# EAGLE board pinball-shield-2016-v1 (EAGLE 7.5.0)
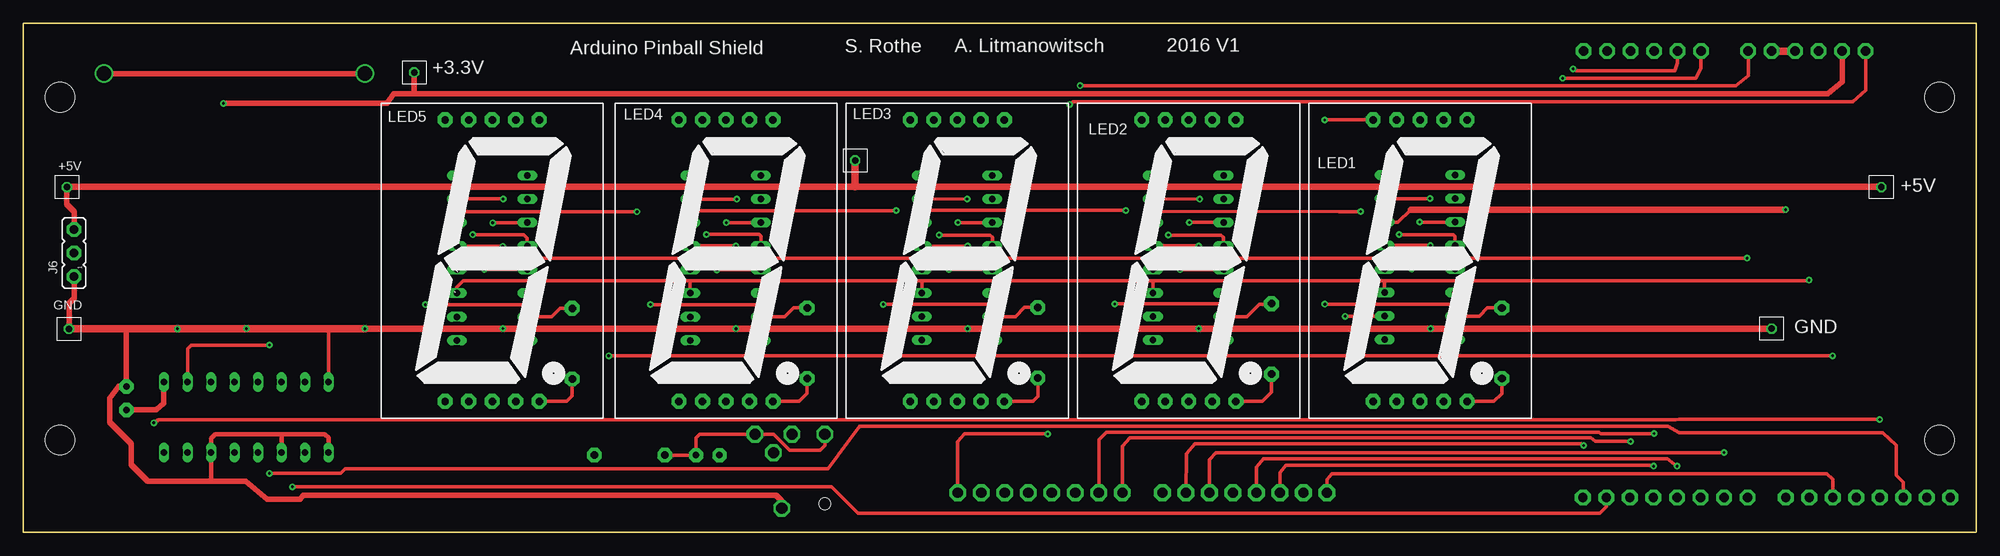
[diagram p0: board, top side]
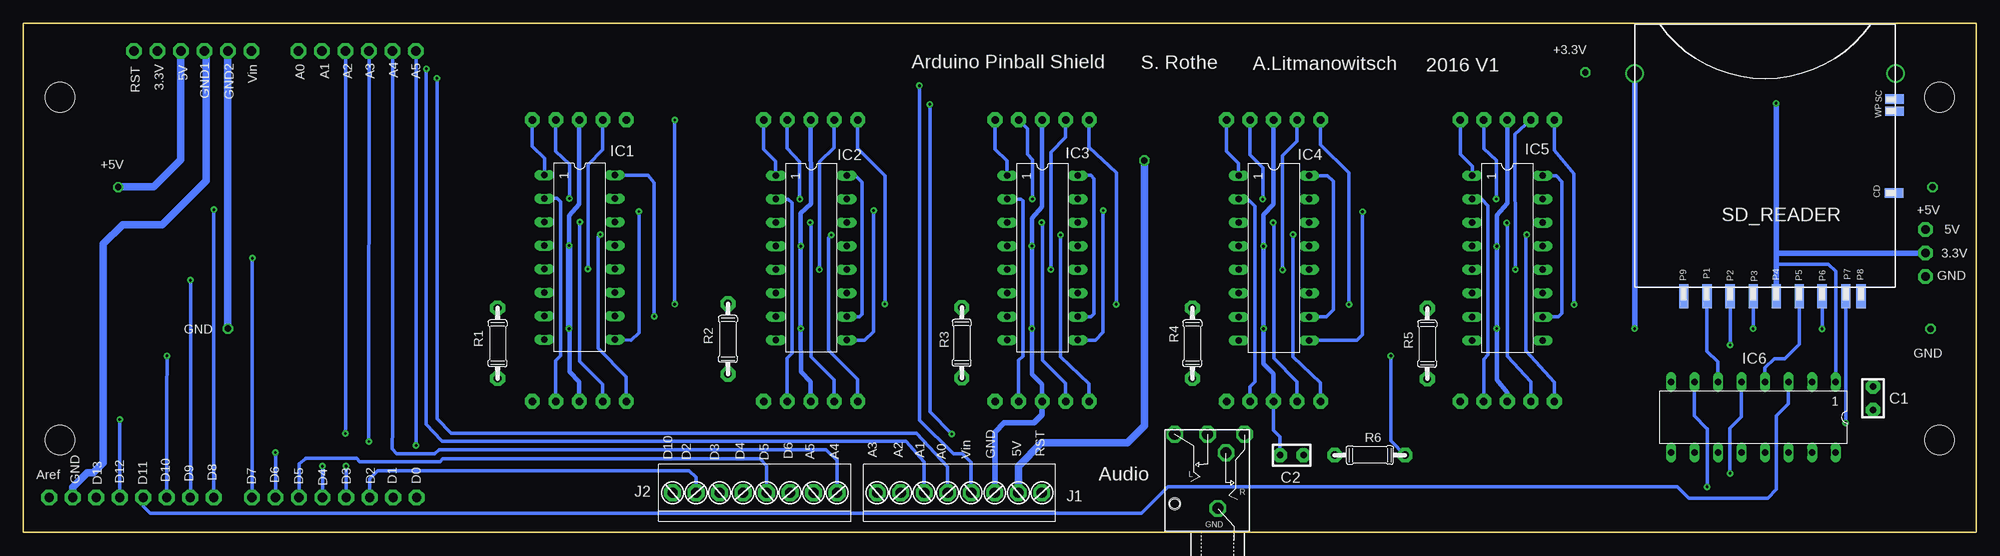
[diagram p1: board, bottom side, seen from below]

Size 211 x 55 mm. Coordinates in mm from the lower left corner, seen from the top.
Outline: 0,0 211,0 211,55 0,55 0,0
Copper layers (1*16): Top 0.035mm / dielectric 1.5mm / Bottom 0.035mm
Design rules "Alit 2 Layer 0_0-16": minimum track width 0.15mm, minimum drill 0.25mm, track to track 0.17mm, track to pad 0.17mm, pad to pad 0.17mm, via to via 0.17mm, smd to smd 0mil, copper to edge 0.5mm, drill to drill 0.6mm, minimum pad ring 0.2mm, minimum via ring 0.2mm, stop-mask expansion 0.16mm, vias tented up to drill 0mil, thermal gap 10mil
Net classes: 0 default: width 0.152 mm, drill 0.305 mm, clearance 0.152 mm; 1 power: width 0.61 mm, drill 0.61 mm, clearance 0.254 mm; 2 gnd: width 0.305 mm, drill 0.559 mm, clearance 0.254 mm; 3 usbvcc: width 0.508 mm, drill 0.61 mm, clearance 0.254 mm; 4 aref: width 0.406 mm, drill 0.61 mm, clearance 0.254 mm
Holes 3.2 mm at 4,10 207,10 207,47 4,47

## Footprints (pad centres in the part's own frame; a part is rotated, then mirrored left to right if it is on the bottom)
02P101QK = drill 0.711 pad 1.524 octagon: 1 0,0; 2 2.54,0
JACK_CONRAD_730294 = drill 1.2 pad 1.8 octagon: 1 0,2.5; 2 2.9,10.5; 3 0.9,8.5; 4 -1.1,10.5; 5 -4.65,10.5 | hole 1.3: -4.65,3
DRILL040 = drill 1 pad 1.7 octagon: P$1 0,0
CON01_FOR_AT2560_ALIT = drill 0.7 pad 1.1 octagon: 1 0,0
DIL16 = drill 0.7 pad 1.1 long: 1 -8.89,-3.81; 2 -6.35,-3.81; 3 -3.81,-3.81; 4 -1.27,-3.81; 5 1.27,-3.81; 6 3.81,-3.81; 7 6.35,-3.81; 8 8.89,-3.81; 9 8.89,3.81; 10 6.35,3.81; 11 3.81,3.81; 12 1.27,3.81; 13 -1.27,3.81; 14 -3.81,3.81; 15 -6.35,3.81; 16 -8.89,3.81
PH2_54X8 = drill 1.1 pad 1.8 octagon: 1 0,0; 2 2.54,0; 3 5.08,0; 4 7.62,0; 5 10.16,0; 6 12.7,0; 7 15.24,0; 8 17.78,0
JP2 = drill 0.9 pad 1.6 octagon: 1 -2.54,0; 2 0,0; 3 2.54,0
7SEG-2.54 = drill 0.8 pad 1.6 octagon: 1 5.92,0.8; 2 8.46,0.8; 3 11,0.8; 4 13.54,0.8; 5 16.08,0.8; 6 16.08,31.21; 7 13.54,31.21; 8 11,31.21; 9 8.46,31.21; 10 5.92,31.21
0204/7 = drill 0.813 pad 1.6 octagon: 1 -3.81,0; 2 3.81,0
104H-TDA0-R = smd 1 x 2: CD 10.165,-13.365; SC 20.3,-13.385; WP 18.99,-13.385 | drill 1.6: GND0 23.055,-13.525; GND1 23.06,14.67 | smd 2.6 x 1: P1 -0.98,6.85; P2 -0.98,4.35; P3 -0.98,1.85; P4 -0.98,-0.63; P5 -0.98,-3.12; P6 -0.98,-5.59; P7 -0.98,-8.15; P8 -0.98,-9.8; P9 -0.98,9.36

## Placement (x,y rotation side)
C1  0.1uF  [02P101QK]  11.16,15.76 270 bottom
C2  1nF  [02P101QK]  72.68,8.35 180 bottom
E$1  [JACK_CONRAD_730294]  81.95,0.1 0 bottom
E$2  [DRILL040]  208.18,3.78 180 top
E$3  [DRILL040]  205.64,3.78 180 top
E$4  [DRILL040]  203.1,3.78 180 top
E$5  [DRILL040]  200.56,3.78 180 top
E$6  [CON01_FOR_AT2560_ALIT]  188.88,22.01 0 top
E$7  [CON01_FOR_AT2560_ALIT]  200.73,37.29 0 top
E$8  [DRILL040]  198.02,3.78 180 top
E$9  [DRILL040]  195.48,3.78 180 top
E$10  [DRILL040]  192.94,3.78 180 top
E$11  [CON01_FOR_AT2560_ALIT]  4.73,37.29 0 top
E$12  [DRILL040]  190.4,3.78 180 top
E$13  [DRILL040]  199.04,51.99 180 top
E$14  [DRILL040]  196.5,51.99 180 top
E$15  [DRILL040]  193.96,51.99 180 top
E$16  [DRILL040]  191.42,51.99 180 top
E$17  [DRILL040]  188.88,51.99 180 top
E$18  [DRILL040]  186.34,51.99 180 top
E$19  [DRILL040]  181.26,51.99 180 top
E$20  [DRILL040]  178.72,51.99 180 top
E$21  [DRILL040]  176.18,51.99 180 top
E$22  [DRILL040]  173.64,51.99 180 top
E$23  [DRILL040]  171.1,51.99 180 top
E$24  [DRILL040]  168.56,51.99 180 top
E$25  [DRILL040]  186.28,3.78 180 top
E$26  [DRILL040]  183.74,3.78 180 top
E$27  [DRILL040]  181.2,3.78 180 top
E$28  [DRILL040]  178.66,3.78 180 top
E$29  [DRILL040]  176.12,3.78 180 top
E$30  [DRILL040]  173.58,3.78 180 top
E$31  [DRILL040]  171.04,3.78 180 top
E$32  [DRILL040]  168.5,3.78 180 top
E$33  [CON01_FOR_AT2560_ALIT]  4.96,21.99 0 top
E$34  [CON01_FOR_AT2560_ALIT]  89.87,40.17 0 top
E$35  [CON01_FOR_AT2560_ALIT]  42.24,49.68 0 top
IC1  SN74LV595  [DIL16]  150.88,29.7 270 bottom
IC2  SN74LV595  [DIL16]  125.86,29.66 270 bottom
IC3  SN74LV595  [DIL16]  100.89,29.66 270 bottom
IC4  SN74LV595  [DIL16]  75.88,29.64 270 bottom
IC5  SN74LV595  [DIL16]  50.66,29.64 270 bottom
IC6  74LS4050  [DIL16]  24.1,12.45 180 bottom
J1  [PH2_54X8]  118.74,4.28 0 bottom
J2  [PH2_54X8]  140.85,4.28 0 bottom
J6  [JP2]  5.5,30.17 90 top
LED1  SC10-21  [7SEG-2.54]  139.92,13.35 0 top
LED2  SC10-21  [7SEG-2.54]  114.92,13.35 0 top
LED3  SC10-21  [7SEG-2.54]  89.92,13.35 0 top
LED4  SC10-21  [7SEG-2.54]  64.92,13.35 0 top
LED5  SC10-21  [7SEG-2.54]  39.67,13.35 0 top
R1  [0204/7]  159.74,20.43 90 bottom
R2  [0204/7]  134.86,20.89 90 bottom
R3  [0204/7]  109.6,20.48 90 bottom
R4  [0204/7]  84.69,20.43 90 bottom
R5  [0204/7]  59.32,20.39 90 bottom
R6  470  [0204/7]  65.52,8.35 0 bottom
SD_READER  [104H-TDA0-R]  22.25,26.5 90 bottom

## Library data of the parts
C1 C2 = DISCRETE
E$1-E$35 J1 J2 = CONNEC
IC1-IC6 = 74XX
J6 = jumper
LED1-LED5 = DISP
R1-R6 = Resistors no SMD
SD_READER = con-sd-attend2

## Nets
3.3V: C1.2 E$14.P$1 E$35.1 IC6.1 J6.2 SD_READER.P4
+5V: E$7.1 E$11.1 E$15.P$1 E$34.1 IC1.10 IC1.16 IC2.10 IC2.16 IC3.10 IC3.16 IC4.10 IC4.16 IC5.10 IC5.16 J1.7 J6.3
GND: C1.1 C2.2 E$1.1 E$3.P$1 E$6.1 E$16.P$1 E$17.P$1 E$33.1 IC1.8 IC1.13 IC2.8 IC2.13 IC3.8 IC3.13 IC4.8 IC4.13 IC5.8 IC5.13 IC6.8 IC6.9 IC6.11 IC6.14 J1.6 J6.1 LED1.3 LED1.8 LED2.3 LED2.8 LED3.3 LED3.8 LED4.3 LED4.8 LED5.3 LED5.8 SD_READER.GND0 SD_READER.GND1 SD_READER.P3 SD_READER.P6
N$1: IC4.15 LED4.7
N$2: IC4.1 LED4.6
N$3: IC4.2 LED4.4
N$4: IC4.3 LED4.2
N$5: IC4.4 LED4.1
N$6: IC4.5 LED4.9
N$7: IC4.6 LED4.10
N$8: IC4.7 R4.2
N$9: LED4.5 R4.1
N$10: IC3.15 LED3.7
N$11: IC3.1 LED3.6
N$12: IC3.2 LED3.4
N$13: IC3.3 LED3.2
N$14: IC3.4 LED3.1
N$15: IC3.5 LED3.9
N$16: IC3.6 LED3.10
N$17: IC3.7 R3.2
N$18: LED3.5 R3.1
N$19: IC2.15 LED2.7
N$20: IC2.1 LED2.6
N$21: IC2.2 LED2.4
N$22: IC2.3 LED2.2
N$23: IC2.4 LED2.1
N$24: IC2.5 LED2.9
N$25: IC2.6 LED2.10
N$26: IC2.7 R2.2
N$27: LED2.5 R2.1
N$28: IC1.15 LED1.7
N$29: IC1.1 LED1.6
N$30: IC1.2 LED1.4
N$31: IC1.3 LED1.2
N$32: IC1.4 LED1.1
N$33: IC1.5 LED1.9
N$34: IC1.6 LED1.10
N$35: IC1.7 R1.2
N$36: LED1.5 R1.1
N$37: IC5.15 LED5.7
N$38: IC5.1 LED5.6
N$39: IC5.2 LED5.4
N$40: IC5.3 LED5.2
N$41: IC5.4 LED5.1
N$42: IC5.5 LED5.9
N$43: IC5.6 LED5.10
N$44: IC5.7 R5.2
N$45: LED5.5 R5.1
S$1: E$10.P$1 IC1.11 IC2.11 IC3.11 IC4.11 IC5.11
S$2: E$25.P$1 IC1.12 IC2.12 IC3.12 IC4.12 IC5.12
S$3: E$12.P$1 IC1.14
S$4: IC1.9 IC2.14
S$5: IC2.9 IC3.14
S$6: IC3.9 IC4.14
S$7: IC4.9 IC5.14
S$8: E$13.P$1 J1.8
S$10: C2.1 E$1.2 E$1.5 R6.1
S$12: E$18.P$1 J1.5
S$13: E$19.P$1 J1.4
S$14: E$20.P$1 J1.3
S$15: E$21.P$1 J1.2
S$16: E$22.P$1 J1.1
S$17: E$29.P$1 J2.3
S$18: E$27.P$1 J2.5
S$19: E$26.P$1 J2.6
S$21: E$30.P$1 J2.2
S$22: E$24.P$1 J2.7
S$23: E$28.P$1 J2.4
S$24: E$23.P$1 J2.8
S$25: E$31.P$1 IC6.7
S$26: E$8.P$1 IC6.3
S$27: E$4.P$1 IC6.5
S$28: E$5.P$1 SD_READER.P7
S$29: IC6.6 SD_READER.P1
S$30: IC6.2 SD_READER.P2
S$31: IC6.4 SD_READER.P5
S$35: E$9.P$1 J2.1 R6.2

## Tracks (layer width: path | path; a pad name or v marks a point on that pad's centre or on a via)
3.3V  (via drill 0.3 pad 0.7)
  Top 0.6: E$14.P$1 196.5,48.66 194.93,47.36 42.25,47.36 | v21.63,46.34 39.34,46.34 40.05,47.35 41.09,47.36 42.25,47.36 | IC6.1 15.21,13.97 14.35,13.23 11.9,13.23 C1.2 | E$35.1 42.24,47.94 42.25,47.36
  Bottom 0.4: IC6.1 15.21,28.18 15.99,28.96 21.61,28.96 21.63,28.98
  Bottom 0.6: v21.63,46.34 21.63,30.2 | 21.63,30.2 21.63,28.98 SD_READER.P4 | J6.2 21.6,30.17 21.63,30.2
+5V  (via drill 0.3 pad 0.7)
  Top 0.4: IC1.16 147.06,37.4 146.99,37.32 | IC2.16 122.05,37.36 122.01,37.32 | IC3.16 97.08,37.35 97.12,37.32 | IC4.16 72.07,37.35 72.04,37.32 | IC5.16 46.85,37.34 46.88,37.32 | IC1.10 142.84,23.36 v142.82,23.34
  Top 0.6: E$11.1 4.73,35.42 5.5,34.65 J6.3
  Top 0.7: 4.76,37.32 46.88,37.32 72.04,37.32 89.85,37.32 97.12,37.32 122.01,37.32 146.81,37.32 146.99,37.32 179.89,37.33 190.48,37.33 200.69,37.33
  Top 0.8: 4.76,37.32 E$11.1 | 200.69,37.33 E$7.1 | E$34.1 89.87,37.34 89.85,37.32
  Bottom 0.4: v142.82,23.34 142.82,37.79 143.49,38.59 146.52,38.59 IC1.16 | IC2.10 120.64,23.3 120.36,23.58 120.36,37.8 121.08,38.52 122.03,38.52 IC2.16 | IC3.10 95.64,23.3 95.32,23.62 95.32,38.19 95.65,38.55 96.95,38.55 IC3.16 | IC4.10 70.21,23.29 69.45,24.05 69.45,37.9 70.08,38.54 71.76,38.53 IC4.16 | IC5.10 45.16,23.29 44.76,23.69 44.76,37.87 45.37,38.54 46.73,38.54 IC5.16
  Bottom 0.8: J1.7 103.5,7.17 101.01,9.66 91.72,9.66 89.85,11.53 89.85,39.74 89.87,39.76 E$34.1 | E$15.P$1 193.96,40.24 196.87,37.33 200.81,37.33 200.85,37.37 200.85,37.3 E$7.1
GND  (via drill 0.3 pad 0.4, 0.3 pad 0.7)
  Top 0.4: IC5.13 50.67,30.91 v51.8,30.9 | IC3.13 101.92,30.93 v102.01,30.93 v102.02,30.94 | IC6.8 32.99,21.92 33.08,22.01 | 179.87,22.05 179.83,22.01 | 11.16,21.97 11.17,21.98 | IC1.8 154.69,22 154.67,22.01 | IC2.8 129.67,22 129.68,22.01 | IC3.8 104.7,21.96 104.66,22.01 | IC4.8 79.69,21.81 79.72,21.84 79.72,21.96 79.77,22.01 | IC5.8 54.48,21.95 54.4,22.02
  Top 0.5: IC1.13 150.91,30.98 v152.02,30.98 | IC2.13 122.07,30.92 v127,30.92 | IC4.13 v77.01,30.91 | 20.32,5.5 20.29,5.53 IC6.14 20.31,8.66 20.31,10.15 20.77,10.61 28.01,10.61 | IC6.9 32.99,10.2 32.58,10.61 28.01,10.61 | IC6.11 27.91,10.51 28.01,10.61
  Top 0.6: 11.17,21.98 11.21,21.99 | SD_READER.GND1 SD_READER.GND0 | E$1.1 81.95,3.43 81.36,4.02 30.27,4.02 29.9,3.6 26.36,3.6 24.06,5.5 20.32,5.5 13.46,5.5 11.66,7.3 11.66,9.59 9.33,11.92 9.33,14.47 10.35,15.76 C1.1 11.16,21.97 | E$33.1 4.96,24.76 5.5,25.3 J6.1
  Top 0.7: E$6.1 179.83,22.01 154.67,22.01 v152.03,22.01 | 125.37,22.01 104.66,22.01 v102.02,22.01 79.77,22.01 v77.01,22.01 v77.01,22.02 54.4,22.02 v51.82,22.02 v36.94,22.02 v36.93,22.01 | 125.37,22.01 125.37,22 | 125.37,22.01 v126.99,22.01 | v126.99,22.01 | v126.99,22.01 129.68,22.01 150.14,22.01 | 150.14,22.01 | 150.14,22.01 v152.03,22.01 | v152.03,22.01
  Top 0.8: E$33.1 11.21,21.99 v16.67,21.99 23.33,22 24.19,22 24.2,22.01 | v24.12,22.01 24.2,22.01 | 24.2,22.01 33.08,22.01 v36.93,22.01 | E$17.P$1 E$16.P$1
  Bottom 0.4: 51.8,22.09 v51.82,22.02 | SD_READER.P3 v24.12,22.01 | v16.67,21.99 SD_READER.P6 | C2.2 75.22,10.34 75.91,11.03 LED4.3
  Bottom 0.5: LED5.8 50.68,35.53 51.78,34.28 v51.8,30.9 51.8,22.09 | v51.82,22.02 51.82,16.51 50.67,15.08 50.67,14.31 50.71,14.27 50.71,14.19 LED5.3 | LED4.8 75.92,35.46 77.03,34.33 v77.01,30.91 v77.01,22.01 77.01,18.2 75.92,17.11 LED4.3 | LED3.8 100.93,35.16 102.02,33.95 v102.02,30.94 v102.02,22.01 102.02,17.08 100.92,15.98 LED3.3 | LED2.8 125.9,35.51 127,34.49 v127,30.92 v126.99,22.01 126.99,17.33 125.92,16.26 LED2.3 | LED1.8 150.92,35.44 152.02,34.22 v152.02,30.98 | LED1.3 150.92,16.27 151.99,17.34 151.99,21.97 v152.03,22.01 v152.02,22.02
  Bottom 0.6: J1.6 106.04,10.84 105.04,11.84 101.78,11.84 100.92,12.7 LED3.3 | SD_READER.GND1 v36.92,22.01 v36.93,22.01
  Bottom 0.7: v152.02,30.98 v152.02,22.02
  Bottom 0.8: 150.94,44.58 LED1.8 | E$17.P$1 188.88,24.31 188.88,23.93 E$6.1 | E$3.P$1 205.65,4.87 204.06,6.45 203.42,6.45 202.35,7.52 202.35,31.15 200.25,33.25 196,33.25 191.25,38 191.25,51.81 E$16.P$1
N$1  (via drill 0.3 pad 0.7)
  Top 0.4: v77.09,35.99 IC4.15
  Bottom 0.4: LED4.7 78.46,40.8 77.08,39.36 77.08,36.03 v77.09,35.99
N$2
  Bottom 0.4: LED4.6 81,41.18 79.7,39.88 IC4.1
N$3
  Bottom 0.4: IC4.2 78.68,35.99 77.94,35.25 77.94,16.25 78.47,15.72 LED4.4
N$4  (via drill 0.3 pad 0.7)
  Top 0.4: v75.97,33.45 IC4.3
  Bottom 0.4: LED4.2 73.38,16.29 75.88,18.79 75.88,33.36 v75.97,33.45
N$5  (via drill 0.3 pad 0.7)
  Top 0.4: v73.82,32.18 79.5,32.18 79.69,31.99 IC4.4
  Bottom 0.4: LED4.1 70.84,16.14 73.83,18.99 v73.83,32.17 v73.82,32.18 v73.83,32.19
N$6  (via drill 0.3 pad 0.7)
  Top 0.4: v74.95,28.36 IC4.5
  Bottom 0.4: LED4.9 73.38,42.24 74.97,40.68 74.97,28.37 v74.95,28.36
N$7  (via drill 0.3 pad 0.7)
  Top 0.4: v67.77,24.61 79.37,24.61 79.67,24.91 79.67,25.81 IC4.6
  Bottom 0.4: LED4.10 70.84,41.88 67.76,38.82 67.76,25.32 v67.77,24.61
N$8
  Top 0.4: IC4.7 82.24,23.29 83.24,24.29 84.64,24.29 R4.2
N$9
  Top 0.4: LED4.5 83.81,14.15 84.68,15.02 84.68,16.61 R4.1
N$10  (via drill 0.3 pad 0.7)
  Top 0.4: v101.97,36.01 IC3.15
  Bottom 0.4: LED3.7 102.49,43.59 102.49,40.84 101.97,40.25 v101.97,36.01
N$11
  Bottom 0.4: LED3.6 106,41.4 104.74,40.14 104.74,38.67 104.77,38.64 104.77,38.61 IC3.1
N$12
  Bottom 0.4: LED3.4 103.46,18.6 102.99,19.04 102.99,35.8 103.18,35.99 104.69,35.99 IC3.2
N$13  (via drill 0.3 pad 0.7)
  Top 0.4: v100.98,33.46 IC3.3
  Bottom 0.4: LED3.2 98.38,16.11 100.9,18.57 100.9,33.24 v100.98,33.46
N$14  (via drill 0.3 pad 0.7)
  Top 0.4: v98.94,32.11 104.46,32.11 104.71,31.86 IC3.4
  Bottom 0.4: LED3.1 95.84,16.07 98.94,18.98 v98.94,32.11
N$15  (via drill 0.3 pad 0.7)
  Top 0.4: v99.98,28.4 IC3.5
  Bottom 0.4: LED3.9 98.38,42.66 99.99,41.05 v99.99,28.41 v99.98,28.4
N$16  (via drill 0.3 pad 0.7)
  Top 0.4: v92.91,24.64 104.38,24.64 104.69,24.97 104.69,25.83 IC3.6
  Bottom 0.4: LED3.10 95.84,41.6 92.91,38.82 v92.91,24.64
N$17
  Top 0.4: IC3.7 107.19,23.3 108.19,24.3 R3.2
N$18
  Top 0.4: LED3.5 109.08,14.15 109.64,14.71 109.64,16.64 R3.1
N$19  (via drill 0.3 pad 0.7)
  Top 0.4: v127.1,35.99 IC2.15
  Bottom 0.4: LED2.7 128.46,41.5 127.11,40.05 127.11,36.05 v127.1,35.99
N$20
  Bottom 0.4: LED2.6 131,41.37 129.7,40.07 129.7,38.58 IC2.1
N$21
  Bottom 0.4: LED2.4 128.46,18.82 127.94,19.34 127.94,35.59 128.35,36 IC2.2
N$22  (via drill 0.3 pad 0.7)
  Top 0.4: v125.99,33.48 129.66,33.48 IC2.3
  Bottom 0.4: LED2.2 123.38,16.5 125.86,18.98 125.86,33.35 v125.99,33.48
N$23  (via drill 0.3 pad 0.7)
  Top 0.4: v123.71,32.12 129.4,32.12 129.66,31.86 IC2.4
  Bottom 0.4: LED2.1 120.84,16.54 123.98,19.68 123.98,31.85 v123.71,32.12
N$24  (via drill 0.3 pad 0.7)
  Top 0.4: v124.98,28.38 IC2.5
  Bottom 0.4: LED2.9 123.38,41.56 124.98,40.04 v124.98,28.38
N$25  (via drill 0.3 pad 0.7)
  Top 0.4: v117.92,24.68 129.52,24.68 129.66,24.84 129.66,25.84 IC2.6
  Bottom 0.4: LED2.10 120.84,41.48 117.9,38.54 117.9,24.72 v117.92,24.68
N$26
  Top 0.4: IC2.7 132.21,23.3 133.55,24.65 134.81,24.65 R2.2
N$27
  Top 0.4: LED2.5 133.85,14.15 134.85,15.15 R2.1
N$28  (via drill 0.3 pad 0.7)
  Top 0.4: v151.98,36.06 IC1.15
  Bottom 0.4: LED1.7 153.46,41.19 151.99,39.76 v151.99,36.07 v151.98,36.06
N$29
  Bottom 0.4: LED1.6 156,41.72 154.68,40.4 154.68,38.74 154.83,38.59 IC1.1
N$30
  Bottom 0.4: LED1.4 153.46,18.54 152.94,19.06 152.94,35.7 153.32,36.08 154.66,36.08 IC1.2
N$31  (via drill 0.3 pad 0.7)
  Top 0.4: v150.87,33.52 IC1.3
  Bottom 0.4: LED1.2 148.38,16 150.87,18.49 v150.87,33.52
N$32  (via drill 0.3 pad 0.7)
  Top 0.4: v148.64,32.17 154.48,32.17 154.69,31.96 IC1.4
  Bottom 0.4: LED1.1 145.84,16.82 148.9,19.88 148.9,31.91 v148.64,32.17
N$33  (via drill 0.3 pad 0.7)
  Top 0.4: v149.99,28.45 154.67,28.45 IC1.5
  Bottom 0.4: LED1.9 148.38,41.31 149.99,39.7 v149.99,28.45
N$34  (via drill 0.3 pad 0.7)
  Top 0.4: LED1.10 140.89,44.56 v140.61,44.53 | v140.62,24.65 154.53,24.65 154.69,24.76 IC1.6
  Bottom 0.4: v140.61,44.53 140.61,24.71 v140.62,24.65
N$35
  Top 0.4: IC1.7 157.31,23.36 158.2,24.25 R1.2
N$36
  Top 0.4: LED1.5 158.9,14.15 159.74,14.99 R1.1
N$37  (via drill 0.3 pad 0.7)
  Top 0.4: v51.86,36.01 46.88,36.01 IC5.15
  Bottom 0.4: LED5.7 53.21,41.44 51.84,40.17 51.84,36.46 v51.86,36.01
N$38
  Bottom 0.4: LED5.6 55.75,40.84 54.47,39.56 IC5.1
  Bottom 0.5: IC5.1
N$39
  Bottom 0.4: LED5.4 53.21,18.72 52.76,19.2 52.75,35.3 53.4,35.99 IC5.2
N$40  (via drill 0.3 pad 0.7)
  Top 0.4: v50.73,33.44 54.47,33.44 IC5.3
  Bottom 0.4: LED5.2 48.13,16.26 50.65,19.03 50.65,33.26 v50.73,33.44
N$41  (via drill 0.3 pad 0.7)
  Top 0.4: v48.56,32.16 54.05,32.16 54.46,31.75 54.46,30.93 IC5.4
  Bottom 0.4: LED5.1 45.59,16.21 48.69,19.64 48.69,31.84 v48.56,32.16
N$42  (via drill 0.3 pad 0.7)
  Top 0.4: v49.8,28.4 54.45,28.39
  Top 0.5: 54.45,28.39 arc-90 IC5.5
  Bottom 0.4: LED5.9 49.83,43.02 v49.8,28.4
N$43  (via drill 0.3 pad 0.7)
  Top 0.4: v43.46,24.59 54.09,24.58 54.49,24.98 54.49,25.82 IC5.6
  Bottom 0.4: LED5.10 45.59,41.28 43.46,38.73 v43.46,24.59
N$44
  Top 0.4: IC5.7 57.11,23.29 58.01,24.19 R5.2
N$45
  Top 0.4: LED5.5 58.7,14.15 59.32,14.77 R5.1
S$1  (via drill 0.3 pad 0.7)
  Top 0.4: IC5.11 46.85,26.5 47.55,27.19 72.04,27.19 | 72.04,27.19 97.17,27.19 | 97.17,27.19 122.04,27.19 | IC2.11 122.05,27.18 122.04,27.19 | IC3.11 97.08,27.11 97.17,27.19 | IC4.11 72.07,27.16 72.04,27.19 | 122.04,27.19 147.08,27.19 | 147.08,27.19 192.93,27.19 v192.92,27.24 | IC1.11 147.06,27.18 147.08,27.19
  Bottom 0.4: v192.92,27.24 192.92,3.81 E$10.P$1
S$2  (via drill 0.3 pad 0.7)
  Top 0.4: IC5.12 46.85,28.98 47.46,29.59 72.05,29.59 | 72.05,29.59 96.95,29.59 | 96.95,29.59 121.98,29.59 | IC2.12 122.05,29.52 121.98,29.59 | IC3.12 97.08,29.45 96.95,29.59 | IC4.12 72.07,29.57 72.05,29.59 | 121.98,29.59 147.09,29.59 | 147.09,29.59 186.21,29.59 v186.24,29.62 | IC1.12 147.06,29.57 147.09,29.59
  Bottom 0.4: v186.24,29.62 186.24,3.81 E$25.P$1
S$3  (via drill 0.3 pad 0.7)
  Top 0.4: IC1.14 148.5,33.52 149.89,34.85
  Top 0.7: 149.89,34.85 v190.39,34.85
  Bottom 0.4: v190.39,34.85 190.39,3.82 E$12.P$1
S$4  (via drill 0.3 pad 0.7)
  Top 0.4: IC2.14 122.05,34.26 122.48,34.69 142.16,34.64 v144.48,34.65
  Bottom 0.4: v144.48,34.65 144.48,21.57 145.33,20.77 IC1.9
S$5  (via drill 0.3 pad 0.7)
  Top 0.4: IC3.14 97.08,34.16 97.64,34.78 118.54,34.78 v119.13,34.77
  Bottom 0.4: v119.13,34.77 119.13,21.68 120.12,20.76 IC2.9
S$6  (via drill 0.3 pad 0.7)
  Top 0.4: IC4.14 72.07,34.23 72.59,34.75 93.89,34.75 v94.33,34.76
  Bottom 0.4: v94.33,34.76 94.33,21.61 95.18,20.78 IC3.9
S$7  (via drill 0.3 pad 0.7)
  Top 0.4: IC5.14 46.85,34.44 47.05,34.63 v66.31,34.63
  Bottom 0.4: v66.31,34.63 66.31,21.35 66.91,20.75 IC4.9
S$8  (via drill 0.3 pad 0.7)
  Top 0.4: E$13.P$1 199.04,47.77 197.63,46.49 113.4,46.49 v113.06,46.23 | J1.8 101.01,4.23 101.01,4.18 100.94,4.25 100.95,9.81 101.67,10.64 v110.69,10.64
  Bottom 0.4: v113.06,46.23 113.06,13.04 v110.69,10.64
S$10
  Top 0.4: E$1.5 86.6,9.43 86.07,8.9 82.79,8.9 81.09,10.6 E$1.2 73.05,10.6 72.69,10.24 C2.1 R6.1
S$12  (via drill 0.3 pad 0.7)
  Top 0.4: E$18.P$1 186.34,49.32 185.03,48.26 v114.18,48.26 v114.17,48.25
  Bottom 0.4: v114.17,48.25 114.17,12.13 110.51,8.47 109.5,8.47 108.6,7.57 108.6,4.3 J1.5
S$13  (via drill 0.3 pad 0.7)
  Top 0.4: E$19.P$1 181.26,50.12 180.69,49.05 v166.3,49.05
  Bottom 0.4: v166.3,49.05 166.3,12.3 164.74,10.69 114.49,10.69 111.13,7.08 J1.4
S$14  (via drill 0.3 pad 0.7)
  Top 0.4: E$20.P$1 178.72,50.66 178.4,49.84 167.76,49.84 v167.44,50.06
  Bottom 0.4: v167.44,50.06 167.44,11.7 165.78,9.88 165.75,9.85 115.64,9.85 113.67,7.64 J1.3
S$15  (via drill 0.3 pad 0.7)
  Top 0.4: v176.19,10.68 170.45,10.68 170.21,10.82 117.02,10.83 116.2,10.01 J1.2
  Bottom 0.4: E$21.P$1 176.18,11.48 v176.19,10.68
S$16  (via drill 0.3 pad 0.7)
  Top 0.4: v173.65,9.82 169.86,9.82 169.35,10.21 119.55,10.21 118.75,9.31 J1.1
  Bottom 0.4: E$22.P$1 173.65,10.16 v173.65,9.82
S$17  (via drill 0.3 pad 0.7)
  Top 0.4: v176.12,7.16 175.75,7.28 136.44,7.28 135.78,6.47 J2.3
  Bottom 0.4: E$29.P$1 176.12,6.21 v176.12,7.16
S$18
  Bottom 0.4: E$27.P$1 181.2,7.41 180.5,7.97 180.48,7.99 174.98,7.99 174.63,7.64 165.97,7.64 165.67,7.94 131.39,7.94 130.68,7.21 J2.5
S$19  (via drill 0.3 pad 0.7)
  Top 0.4: v183.74,8.62 128.85,8.62 128.15,7.86 J2.6
  Bottom 0.4: E$26.P$1 183.74,7.11 v183.74,8.62
S$21
  Bottom 0.4: E$30.P$1 173.58,5.78 172.72,6.64 139.04,6.64 138.31,5.98 J2.2
S$22  (via drill 0.3 pad 0.7)
  Top 0.4: v168.56,9.39 168.28,9.59 126.57,9.59 125.67,8.52 J2.7
  Bottom 0.4: E$24.P$1 168.56,10.05 v168.56,9.39
S$23  (via drill 0.3 pad 0.7)
  Top 0.4: J2.4 133.22,7.03 133.99,7.98 177.64,7.98 v178.66,7.16
  Bottom 0.4: E$28.P$1 178.66,6.24 v178.66,7.16
S$24
  Bottom 0.4: E$23.P$1 171.1,10.76 171.11,9.65 171.11,9.03 170.67,8.5 166.54,8.5 166.07,8.94 124.24,8.94 123.09,7.79 123.09,4.3 J2.8
S$25  (via drill 0.3 pad 0.7)
  Top 0.4: E$31.P$1 171.04,2.76 170.35,2.07 90.2,2.07 87.35,4.92 v29.09,4.92
  Bottom 0.4: 30.41,16.46 30.47,16.4 30.47,16.28 | 30.47,16.28 IC6.7 | 30.47,16.28 30.47,12.62 29.17,11.27 29.09,11.2 v29.09,4.92
S$26
  Bottom 0.4: E$8.P$1 198.04,2.83 197.27,2.07 90.2,2.07 87.35,4.92 32.28,4.92 31.07,3.71 25.2,3.71 25.19,3.7 22.55,3.7 21.6,4.65 21.6,12.6 20.29,13.91 IC6.3
S$27  (via drill 0.3 pad 0.7)
  Top 0.4: E$4.P$1 203.1,5.4 202.34,6.16 202.34,9.44 200.9,10.76 178.9,10.76 177.69,11.47 90.33,11.47 86.94,6.85 34.77,6.85 34.29,6.37 v26.61,6.38
  Bottom 0.4: v26.61,6.38 26.61,11.24 25.37,12.48 IC6.5
S$28  (via drill 0.3 pad 0.7)
  Top 0.4: v200.56,12.2 178.87,12.2 178.5,12.19 14.62,12.19 v14.12,11.83
  Bottom 0.4: E$5.P$1 200.56,11.69 v200.56,12.2 | v14.12,11.83 14.12,25.5 SD_READER.P7
S$29
  Bottom 0.4: IC6.6 27.93,16.28 27.93,18.41 29.11,19.54 29.1,19.55 SD_READER.P1
S$30  (via drill 0.3 pad 0.7)
  Top 0.4: v26.6,20.23 18.13,20.23 17.75,19.85 IC6.2
  Bottom 0.4: SD_READER.P2 v26.6,20.23
S$31
  Bottom 0.4: IC6.4 22.83,17.76 21.83,18.76 20.71,18.76 19.13,20.34 SD_READER.P5
S$35  (via drill 0.3 pad 0.7)
  Top 0.4: E$9.P$1 195.49,5.72 194.84,6.35 141.37,6.35 140.85,5.69 J2.1 | v195.46,19.07 v63.25,19.07
  Bottom 0.4: E$9.P$1 195.49,14.76 v195.46,19.07 | v63.25,19.07 63.25,9.9 R6.2

## Text on the board
tNames: 2016 V1 | Arduino Pinball Shield | S. Rothe | A. Litmanowitsch | +3.3V | +5V | +5V | GND | GND
bNames: +3.3V | S. Rothe | Arduino Pinball Shield | 2016 V1 | A.Litmanowitsch | A5 | A4 | A3 | A2 | A1 | A0 | Vin | GND2 | GND1 | 3.3V | 5V | RST | +5V | +5V | 5V | 3.3V | GND | GND | GND | RST | 5V | GND | Vin | A0 | A1 | A2 | A3 | A4 | A5 | D6 | D5 | D4 | D3 | D2 | D10 | Audio | D8 | Aref | D0 | D1 | D2 | D3 | D4 | D5 | D6 | D7 | D9 | D10 | D11 | D12 | D13 | GND
DrillLegend_01-16: 01-16
DrillLegend_01-20: 01-20